# EAGLE board TDA2003 (EAGLE 9.4.2)
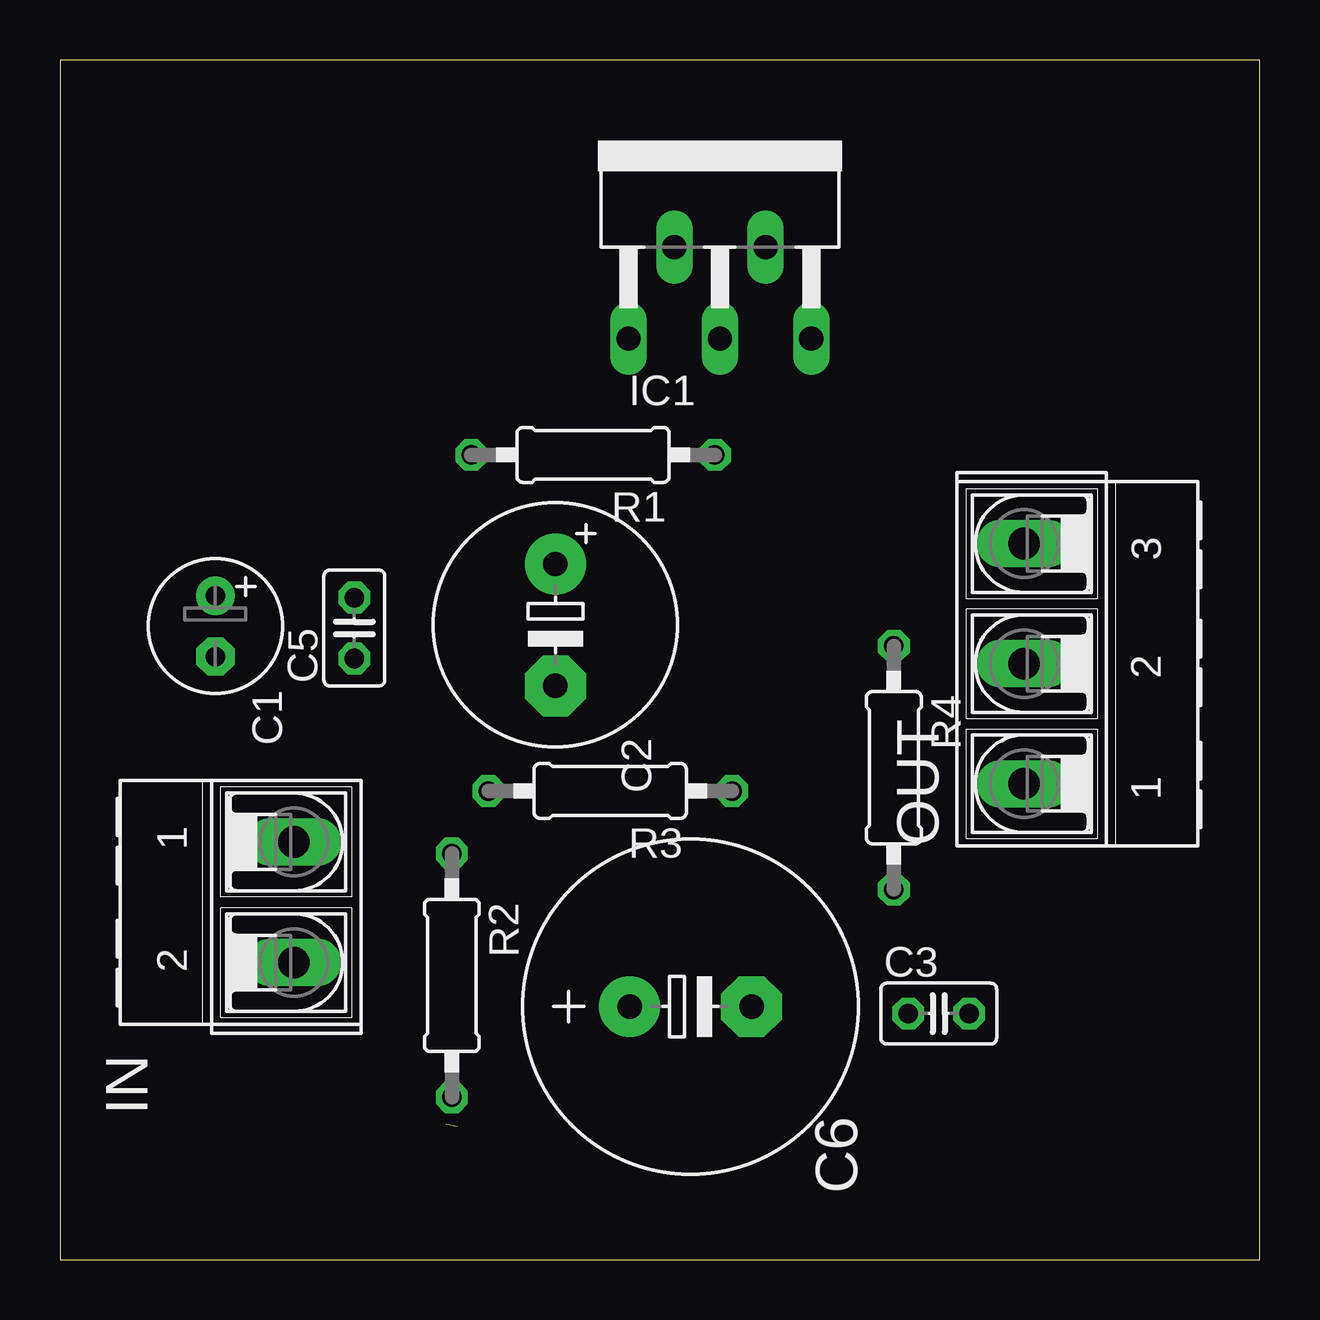
[diagram p0: board, top side]
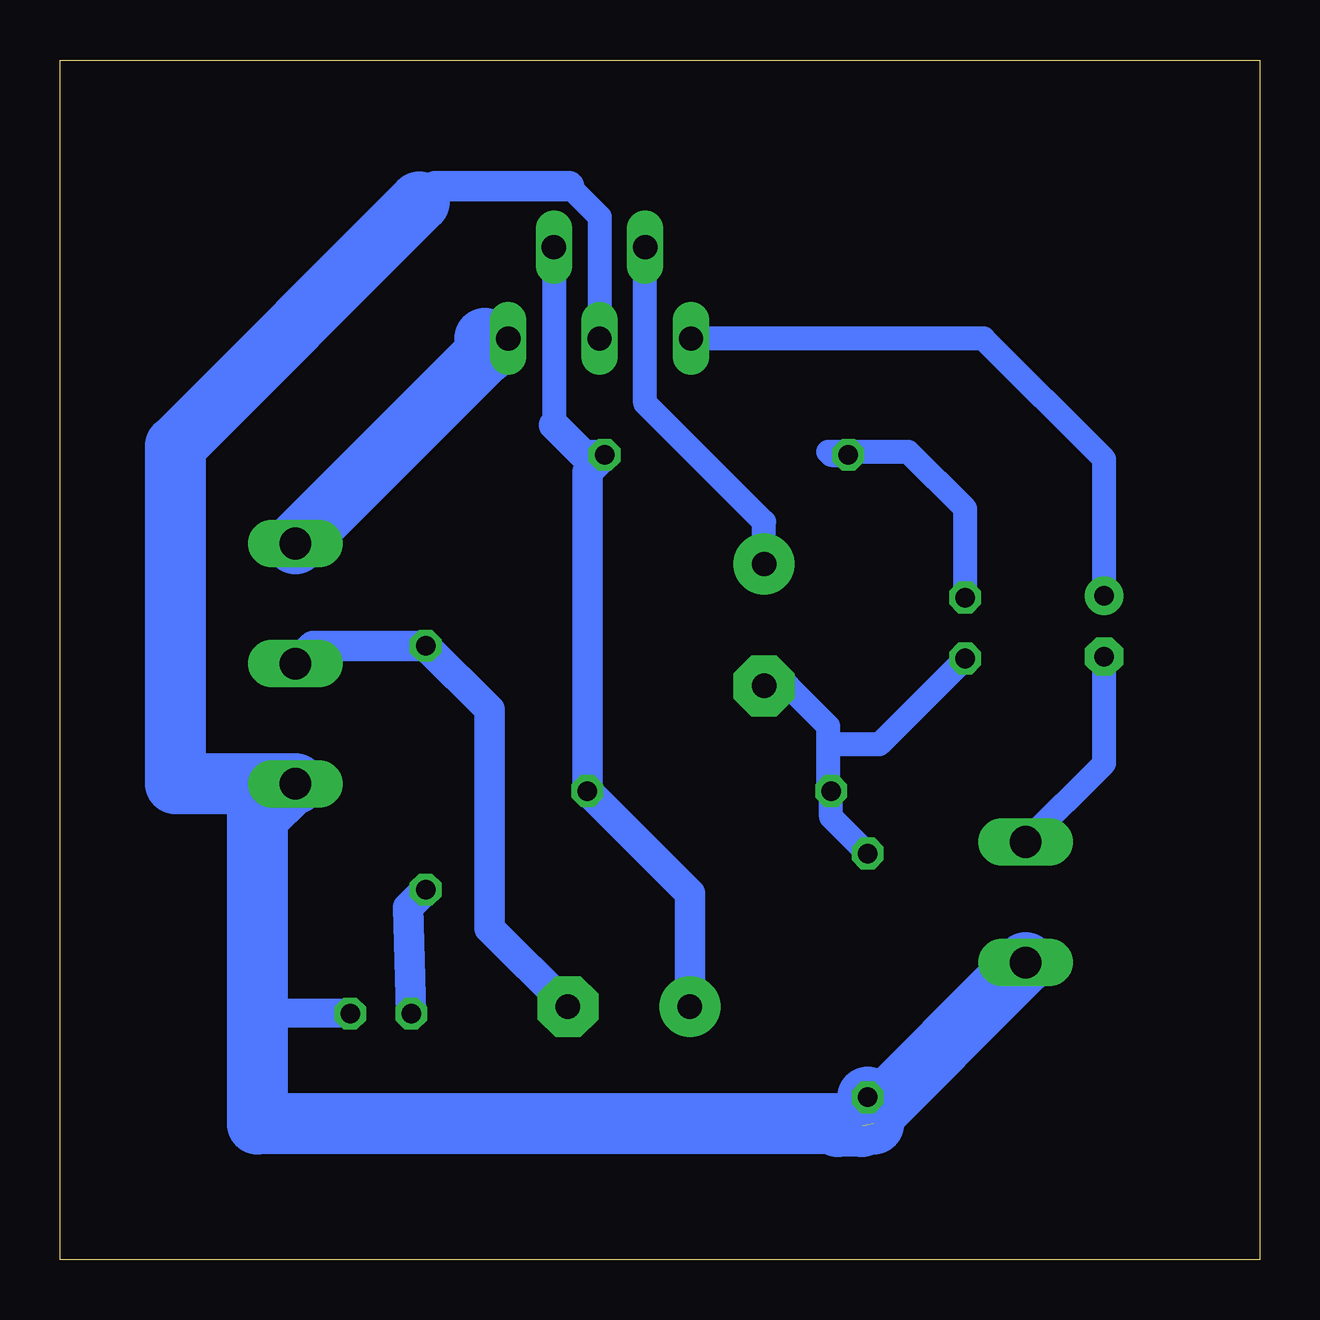
[diagram p1: board, bottom side, seen from below]

Size 50 x 50 mm. Coordinates in mm from the lower left corner, seen from the top.
Outline: 0,0 50,0 50,50 0,50 0,0
Copper layers (1*16): Top 0.035mm / dielectric 1.5mm / Bottom 0.035mm
Design rules "default *": minimum track width 1mm, minimum drill 0.35mm, track to track 6mil, track to pad 6mil, pad to pad 6mil, via to via 6mil, smd to smd 6mil, copper to edge 40mil, drill to drill 6mil, minimum pad ring 10mil, minimum via ring 8mil, stop-mask expansion 4mil, vias tented up to drill 0mil, thermal gap 10mil

## Footprints (pad centres in the part's own frame; a part is rotated, then mirrored left to right if it is on the bottom)
E2,5-6 = drill 0.813 pad 1.6: + -1.27,0 | drill 0.813 pad 1.6 octagon: - 1.27,0
E5-10,5 = drill 1.016 pad 2.54: + -2.54,0 | drill 1.016 pad 2.54 octagon: - 2.54,0
C025-025X050 = drill 0.813 octagon: 1 -1.27,0; 2 1.27,0
E5-13 = drill 1.016 pad 2.54: + -2.54,0 | drill 1.016 pad 2.54 octagon: - 2.54,0
CB360 = drill 1.016 long: 1 -3.81,-8.255; 2 -1.905,-4.445; 3 0,-8.255; 4 1.905,-4.445; 5 3.81,-8.255
AK500/2-H = drill 1.321 long: 1 -2.515,0; 2 2.515,0
AK500/3-H = drill 1.321 long: 1 -5.004,0; 2 0,0; 3 5.004,0
0207/10 = drill 0.813 octagon: 1 -5.08,0; 2 5.08,0

## Placement (x,y rotation side)
C1  10uF  [E2,5-6]  6.48,26.4 270 top
C2  470uF  [E5-10,5]  20.65,26.45 270 top
C3  100nF  [C025-025X050]  36.63,10.25 0 top
C5  39nF  [C025-025X050]  12.27,26.32 90 top
C6  1000uF  [E5-13]  26.29,10.54 0 top
IC1  TDA2003V  [CB360]  27.51,46.64 0 top
IN  [AK500/2-H]  9.75,14.89 270 top
OUT  [AK500/3-H]  40.19,24.84 90 top
R1  39  [0207/10]  22.22,33.54 180 top
R2  2.2  [0207/10]  16.33,11.84 270 top
R3  220  [0207/10]  22.93,19.53 180 top
R4  1  [0207/10]  34.76,20.5 270 top

## Library data of the parts
C1-C3 C5 C6 = rcl; SPICEPREFIX: C
IC1 = linear
IN OUT = con-ptr500; OC_FARNELL: unknown; OC_NEWARK: unknown
R1-R4 = rcl; SPICEPREFIX: R

## Nets
GND: C3.2 IC1.3 IN.2 OUT.1 R2.2
N$1: C1.+ IC1.1
N$2: C1.- IN.1
N$3: C6.+ IC1.4 R1.1 R3.1
N$4: C6.- OUT.2 R4.1
N$5: C2.- C5.1 R2.1 R3.2
N$6: C3.1 R4.2
N$7: C2.+ IC1.2
N$8: C5.2 R1.2
VCC: IC1.5 OUT.3

## Tracks (layer width: path | path; a pad name or v marks a point on that pad's centre or on a via)
GND  (1 unrouted)
  Bottom 1: 40.35,19.83 OUT.1 40.19,19.76 | IC1.3 27.51,43.47 28.78,44.74 | 41.56,10.25 41.77,10.03
  Bottom 1.2: C3.2 41.56,10.25
  Bottom 1.27: 28.78,44.74 34.36,44.74 35.02,44.08
  Bottom 2.54: IN.2 16.58,5.55 17.59,5.55 | 40.35,19.83 41.77,18.41 41.77,10.03 41.77,5.66 16.09,5.66 16.09,6.52 R2.2 | OUT.1 45.19,19.83 45.19,33.91 35.02,44.08
N$1
  Bottom 1: C1.+ 6.48,33.36 11.51,38.39 IC1.1
N$2
  Bottom 1: IN.1 6.48,20.68 C1.-
N$3
  Bottom 1: IC1.4 29.41,34.79
  Bottom 1.27: 29.41,34.79 28.16,33.54 R1.1 28.02,32.82 R3.1 23.75,15.26 C6.+
N$4
  Bottom 1.27: C6.- 32.09,13.81 32.09,22.92 R4.1 39.45,25.58 OUT.2
N$5
  Bottom 1: R2.1 17.86,18.45 R3.2 17.97,19.65 17.97,21.47 | 17.97,21.47 17.97,22.22 19.66,23.91 C2.- | C5.1 15.85,21.47 17.97,21.47
N$6
  Bottom 1.27: R4.2 34.76,15.4 35.49,14.67 C3.1
N$7
  Bottom 1: IC1.2 25.6,35.7 20.65,30.74 C2.+
N$8
  Bottom 1: C5.2 12.27,31.29 14.64,33.66 17.97,33.66 17.85,33.54 R1.2
VCC
  Bottom 1.27: 32.3,38.39 IC1.5 | OUT.3 36.1,33.93
  Bottom 2.54: OUT.3 32.3,37.73 32.3,38.39